# EAGLE board ds3231 (EAGLE 6.3)
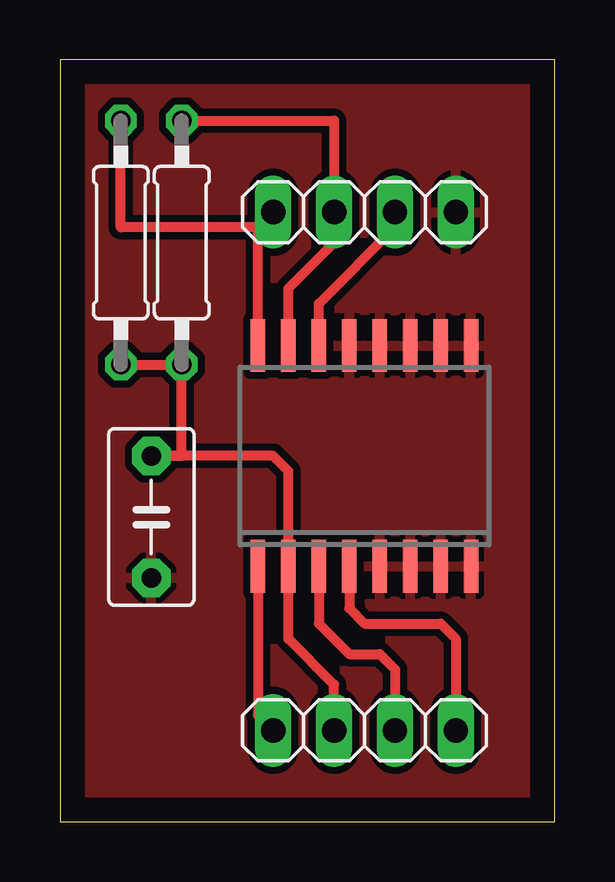
[diagram p0: board, top side]

Size 20.62 x 31.74 mm. Coordinates in mm from the lower left corner, seen from the top.
Outline: 0,0 20.62,0 20.62,31.74 0,31.74 0,0
Copper layers (1*16): Top 0.035mm / dielectric 1.5mm / Bottom 0.035mm
Design rules "default *": minimum track width 10mil, minimum drill 24mil, track to track 12mil, track to pad 12mil, pad to pad 12mil, via to via 12mil, smd to smd 12mil, copper to edge 40mil, drill to drill 8mil, minimum pad ring 10mil, minimum via ring 8mil, stop-mask expansion 4mil, vias tented up to drill 0mil, thermal gap 10mil

## Footprints (pad centres in the part's own frame; a part is rotated, then mirrored left to right if it is on the bottom)
C5B3.5 = drill 0.813 pad 1.6 octagon: 1 -2.54,0; 2 2.54,0
SO16W = smd 0.6 x 2.2: 1 -4.445,-4.6; 2 -3.175,-4.6; 3 -1.905,-4.6; 4 -0.635,-4.6; 5 0.635,-4.6; 6 1.905,-4.6; 7 3.175,-4.6; 8 4.445,-4.6; 9 4.445,4.6; 10 3.175,4.6; 11 1.905,4.6; 12 0.635,4.6; 13 -0.635,4.6; 14 -1.905,4.6; 15 -3.175,4.6; 16 -4.445,4.6
1X04 = drill 1.016 long: 1 -3.81,0; 2 -1.27,0; 3 1.27,0; 4 3.81,0
0207/10 = drill 0.813 octagon: 1 -5.08,0; 2 5.08,0

## Placement (x,y rotation side)
C1  [C5B3.5]  3.81,12.7 270 top
IC1  DS3231SN  [SO16W]  12.7,15.24 0 top
JP1  [1X04]  12.7,25.4 0 top
JP2  [1X04]  12.7,3.81 0 top
R1  [0207/10]  2.54,24.13 270 top
R2  [0207/10]  5.08,24.13 270 top

## Library data of the parts
C1 = capacitor-wima
IC1 = comfile
JP1 JP2 = pinhead
R1 R2 = resistor

## Nets
GND: C1.2 IC1.5 IC1.6 IC1.7 IC1.8 IC1.9 IC1.10 IC1.11 IC1.12 IC1.13 JP1.4
N$1: C1.1 IC1.2 JP2.2 R1.2 R2.2
N$2: IC1.1 JP2.1
N$3: IC1.14 JP1.3
N$4: IC1.4 JP2.4
N$5: IC1.3 JP2.3
N$7: IC1.15 JP1.2 R2.1
R1: IC1.16 JP1.1 R1.1

## Tracks (layer width: path | path; a pad name or v marks a point on that pad's centre or on a via)
GND
  pour Top: 0,31.75 20.32,31.75 20.32,0 0,0
N$1
  Top 0.406: R1.2 R2.2 5.08,15.24 C1.1 8.89,15.24 9.53,14.61 IC1.2 9.53,7.62 11.43,5.71 JP2.2
N$2
  Top 0.406: IC1.1 8.26,4.45 JP2.1
N$3
  Top 0.406: IC1.14 10.79,21.59 13.97,24.77 JP1.3
N$4
  Top 0.406: IC1.4 12.07,8.89 12.7,8.26 15.88,8.26 16.51,7.62 JP2.4
N$5
  Top 0.406: IC1.3 10.79,8.26 12.07,6.99 13.34,6.99 13.97,6.35 JP2.3
N$7
  Top 0.406: R2.1 11.43,29.21 JP1.2 11.43,24.13 9.53,22.23 IC1.15
R1
  Top 0.406: IC1.16 8.26,24.77 | 8.26,24.77 JP1.1 | 8.26,24.77 2.54,24.77 R1.1